# Altium PCB ZUCC_EG_Robot2018_Ver1.0.PcbDoc
Units mm, origin at the board's own origin, x right, y up, seen from the top; angles counter-clockwise.
Board outline 99.95 x 99.95 mm, 2 copper layers (Top Layer, Bottom Layer); 25 components, 35 nets, 203 pads, 25 vias.
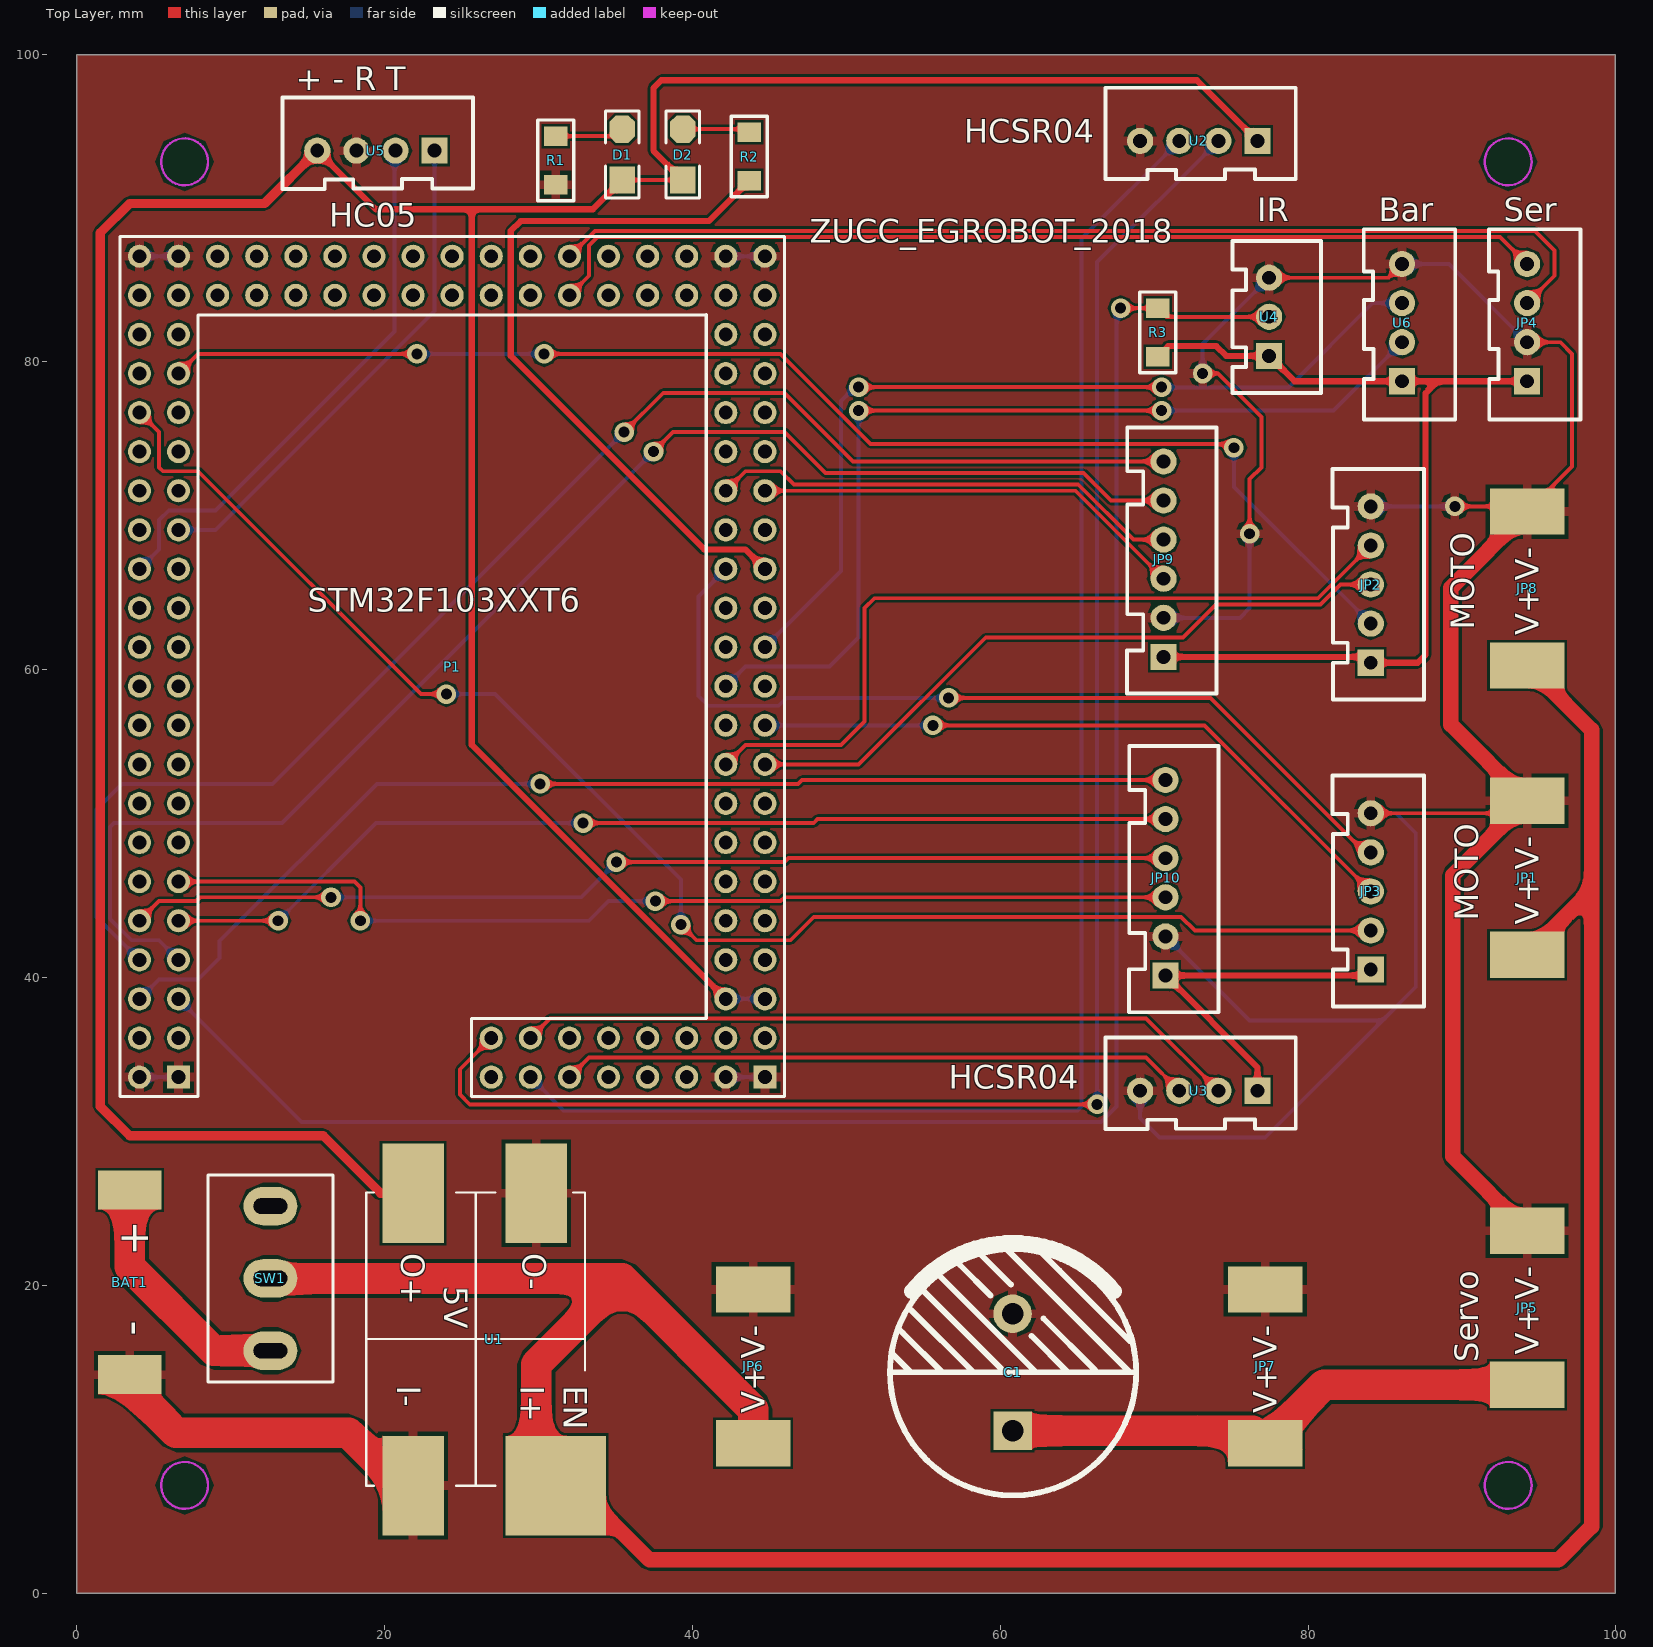
[diagram p0: Top Layer view]
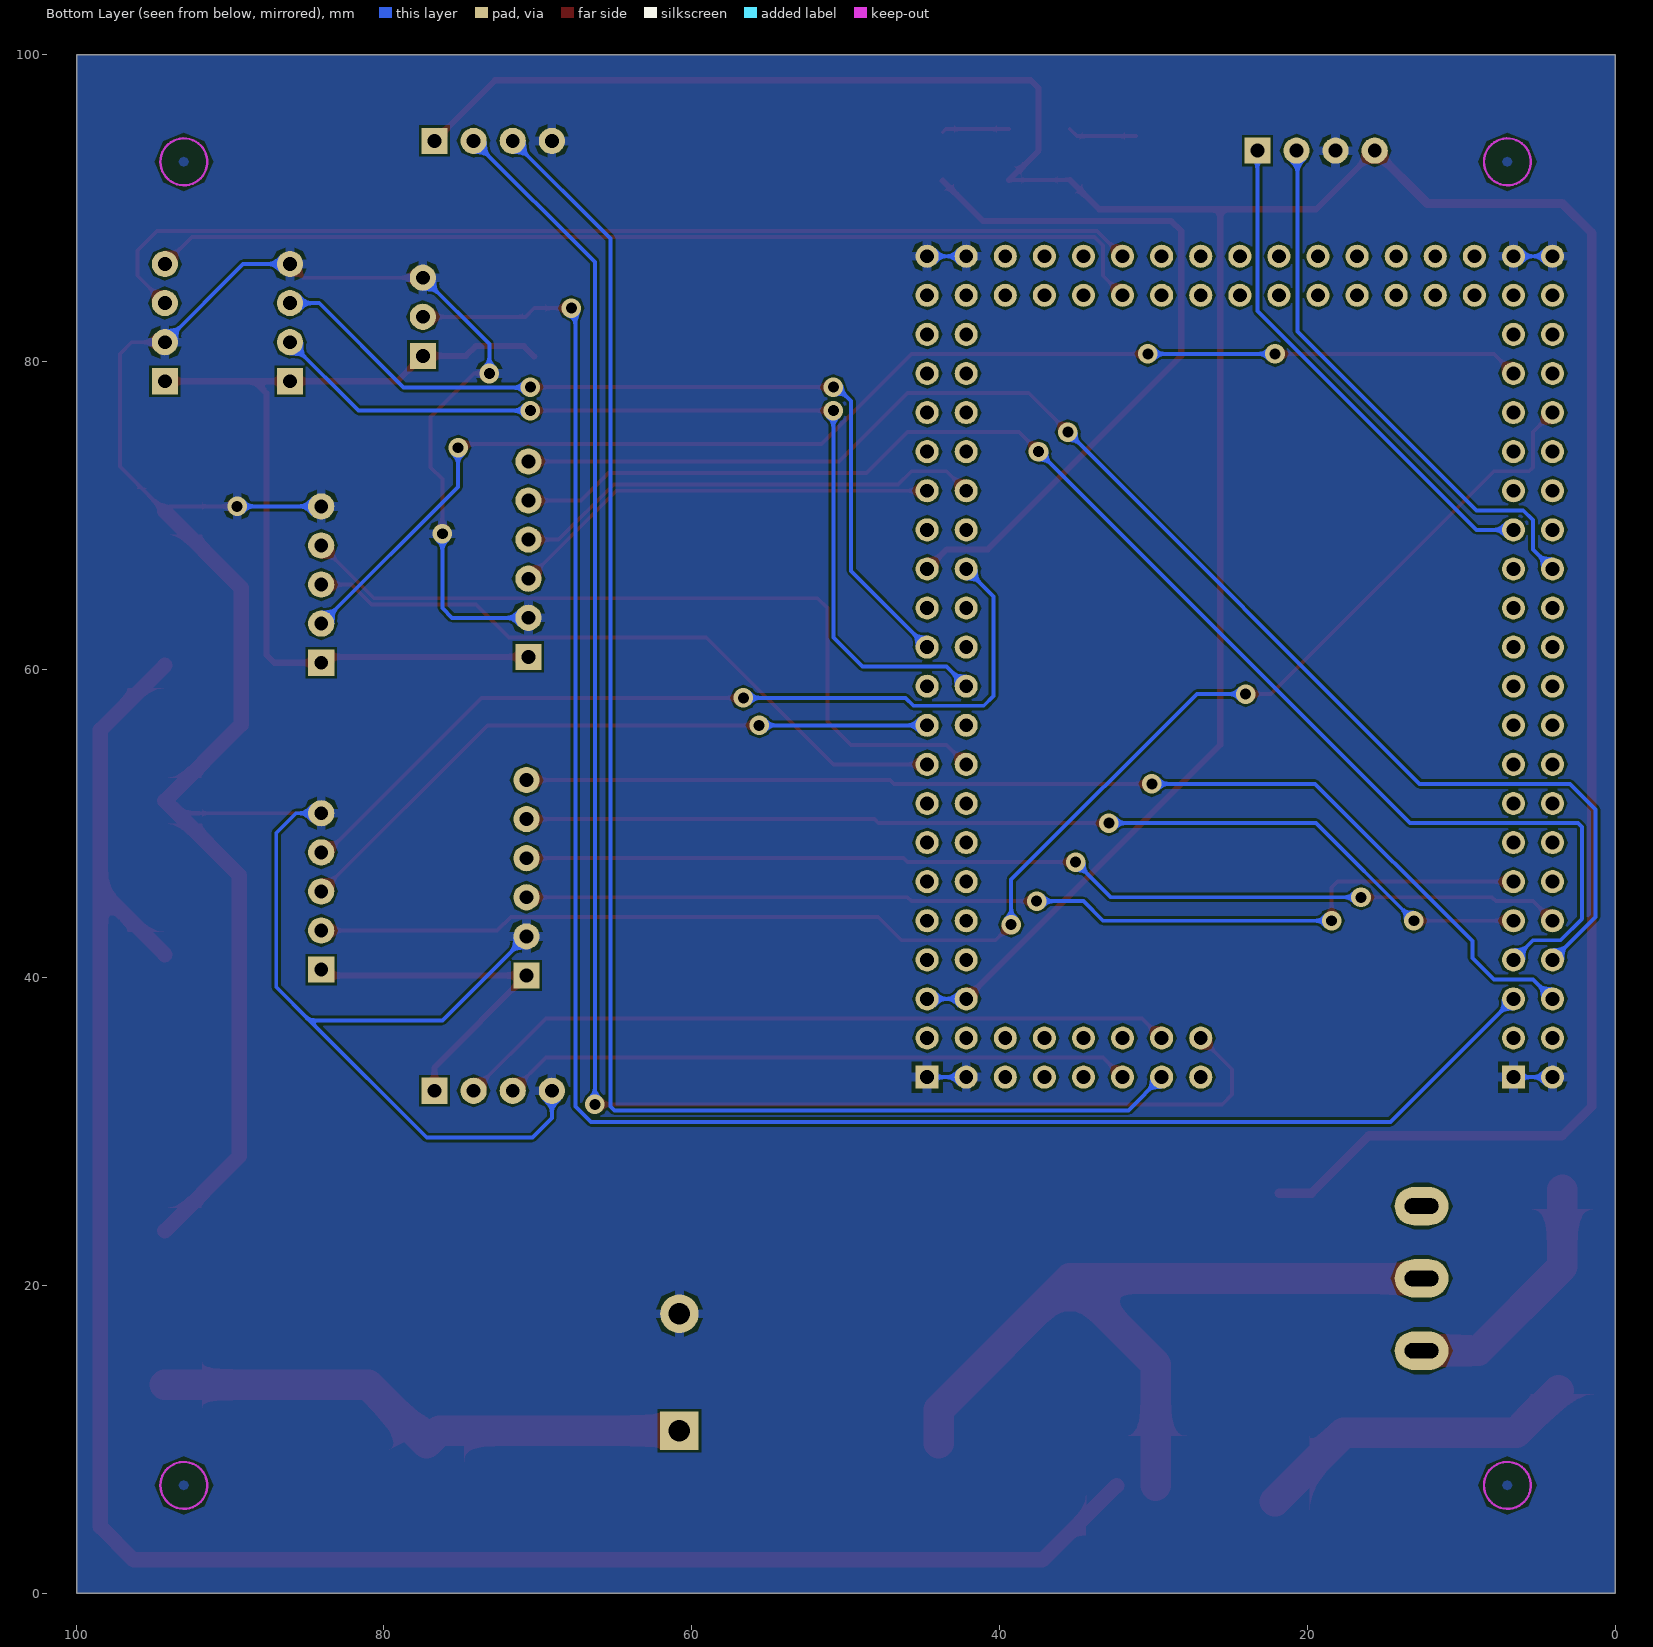
[diagram p1: Bottom Layer view, seen from below]
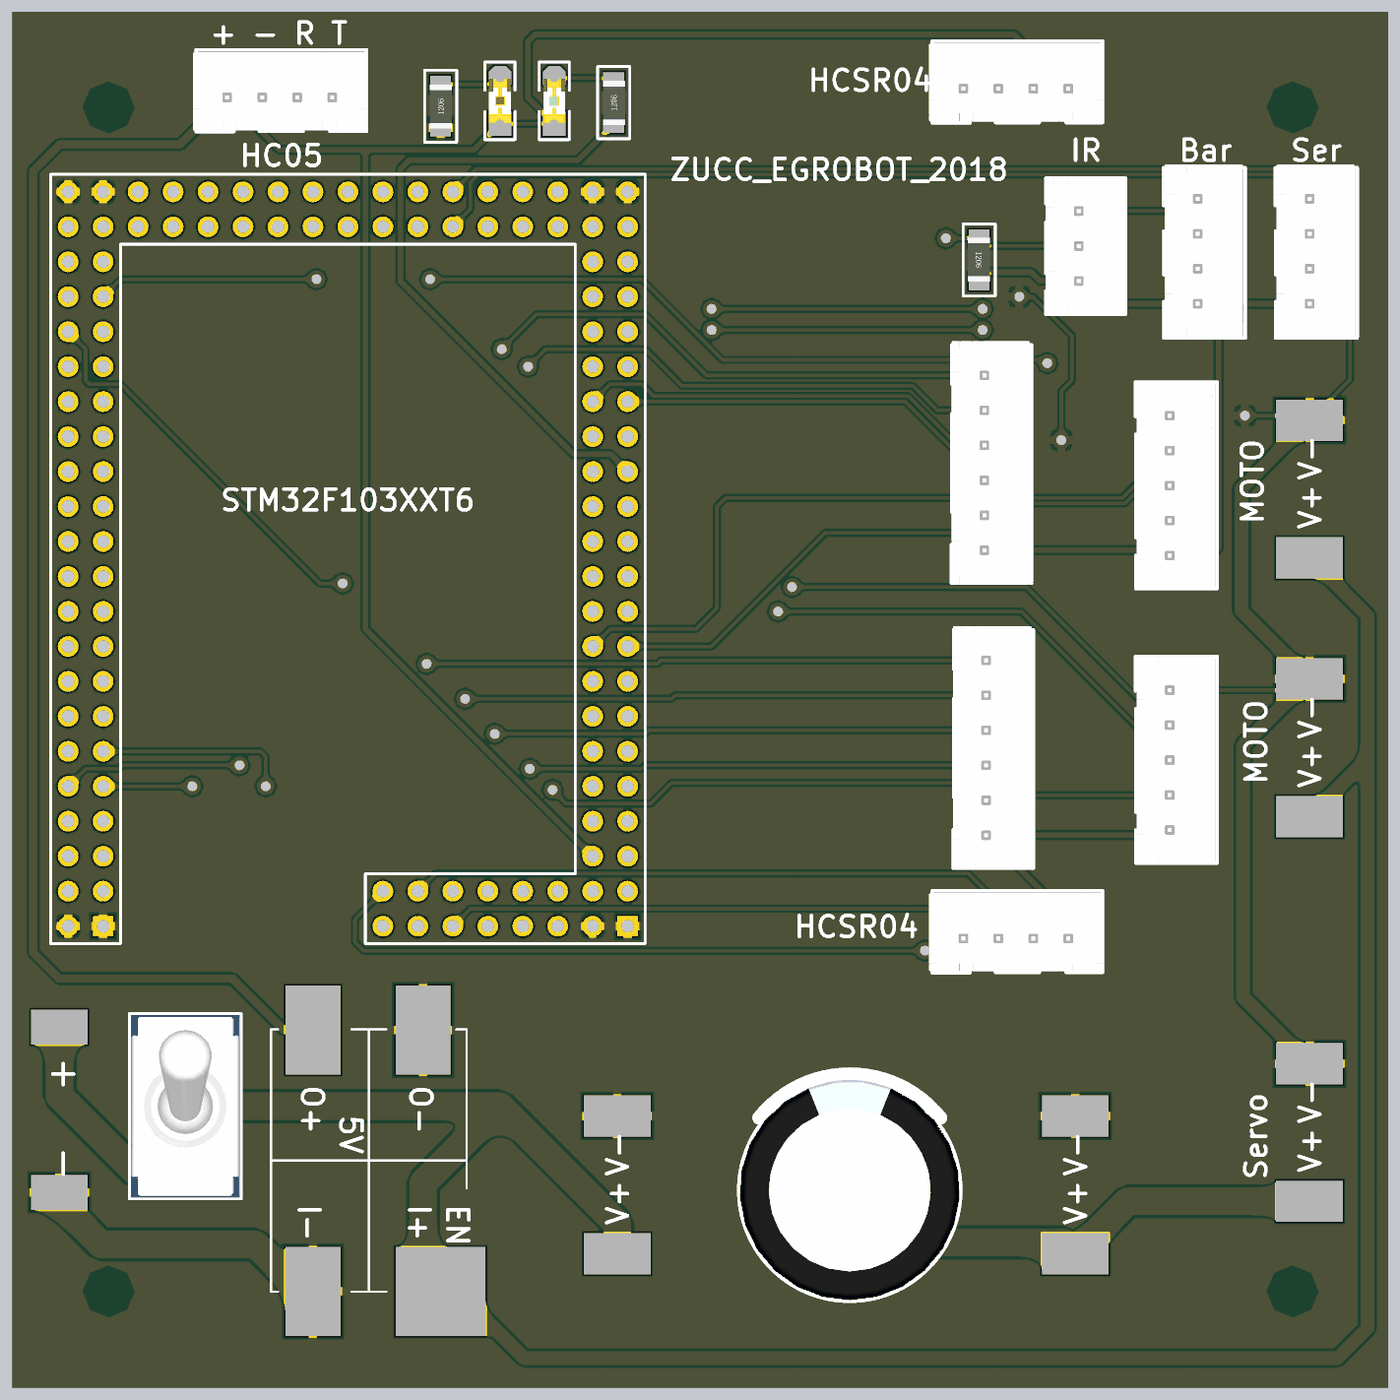
[diagram p2: 3D render of the assembled board from above, using the file's embedded part models]

## Layer stack, top to bottom
Top Solder: solder mask 0.0102, Solder Resist, Dk 3.5
Top Layer: signal copper 0.0356
Dielectric 1: dielectric 0.32, FR-4, Dk 4.8
Bottom Layer: signal copper 0.0356
Bottom Solder: solder mask 0.0102, Solder Resist, Dk 3.5

## Board outline
0,0 99.949,0 99.949,99.949 0,99.949

## Design rules (kind name [scope] priority, off if disabled: settings)
Clearance [All] p1: gap=0.152 ignorepadtopadclearanceinfootprint=FALSE
ComponentClearance ComponentClearance_P1 [HasFootprint('YD最小系统版接口')] p1: gap=0 collisioncheckmode=3 verticalgap=0
ComponentClearance [All] p2: gap=0.254 collisioncheckmode=3 verticalgap=0.254 showdistances=FALSE
Height [All] p1: minheight=0 maxheight=100 prefheight=12.7
HoleSize [All] p1: absolutevalues=TRUE maxlimit=6 minlimit=0.3 maxpercent=80.000 minpercent=20.000
HoleToHoleClearance [All] p1: gap=0.152 allowstackedmicrovias=TRUE
PolygonConnect [All] p1: connectstyle=Relief reliefconductorwidth=0.6 reliefentries=4 polygonreliefangle="90 Angle" airgapwidth=0.254
RoutingVias [All] p1: holewidth=0.3 width=0.6 viastyle="Through Hole" minholewidth=0.2 minwidth=0.45 maxholewidth=6.3 maxwidth=5
SilkToSilkClearance [All] p1: silktosilkclearance=0.152
SilkToSolderMaskClearance [IsPad] p1: minsilkscreentomaskgap=0.152 clearancetoexposedcopper=TRUE
SolderMaskExpansion [All] p1: expansion=0.102
Width [All] p1: maxlimit=6 minlimit=0.152 preferedwidth=0.254
24 further rules are at their usual default settings.

## Components (designator, comment, footprint, x,y, rotation, side; value= is the part's Value field where it differs from the comment)
BAT1 "BAT7.4" POWER 3.429,20.193 r270 top
C1 "4.7mF" "CAP 7.5*16*31.5 - BK" 60.833,14.351 r90 top
D1 "1206LED" "LED 1206R" 35.433,93.472 r90 top
D2 "LED" "LED 1206Y" 39.37,93.472 r90 top
JP1 "电机电源接口" SMALL_POWER_JACK 94.234,46.482 r90 top
JP2 "Jack" XH2.54-LI-5P 84.074,65.532 r90 top
JP3 "Jack" XH2.54-LI-5P 84.074,45.593 r90 top
JP4 "舵机控制串口" XH2.54-LI-4P 94.234,82.55 r90 top
JP5 "DCservo" SMALL_POWER_JACK 94.234,18.542 r90 top
JP6 "DC_ServoIN" SMALL_POWER_JACK 43.942,14.732 r90 top
JP7 "DC_ServoOUT" SMALL_POWER_JACK 77.216,14.732 r90 top
JP8 "电机电源接口" SMALL_POWER_JACK 94.234,65.278 r90 top
JP9 "Jack" XH2.54-LI-6P 70.612,67.183 r90 top
JP10 "Jack" XH2.54-LI-6P 70.739,46.482 r90 top
P1 "Header 63X2" YD最小系统版接口 24.384,60.198 r90 top
R1 "R" 1206R 31.115,93.091 r90 top
R2 "R" 1206R 43.688,93.345 r90 top
R3 "R" 1206R 70.231,81.915 r270 top
SW1 "MTS-10" MTS-10x 12.573,20.448 r90 top
U1 "DC5V" DC5V_BUCKBOOST 25.908,16.51 r270 top
U2 "距离传感器" XH2.54-LI-4P 72.898,94.361 r180 top
U3 "距离传感器" XH2.54-LI-4P 72.898,32.639 r180 top
U4 "漫反射红外避障" XH2.54-LI-3P 77.47,82.931 r90 top
U5 "HC05" XH2.54-LI-4P 19.431,93.726 r180 top
U6 "扫码枪串口" XH2.54-LI-4P 86.106,82.55 r90 top

## Footprints (in the part's own frame and the unit in brackets; to place one, negate y for a bottom-side part, rotate by r counter-clockwise, add the part's x,y. Pads: shape width x height; smd on the part's side, far side on the other; paste and mask are expansions set on the pad)
1206R [mil]
  rect 50x60 smd: 1(-62,0) 2(62,0)
  silkscreen extent -103,-46 103,46, body extent -64,-32 62,31, height 24
"CAP 7.5*16*31.5 - BK" [mm] "脚距7.5mm直径16mm高度31.5mm"
  rect 2.5x2.5 hole 1.4: 1(-3.8,0.038)
  round 2.5 hole 1.4: 2(3.8,0.038)
  silkscreen extent -8,-8 8.42,8, body extent -8,-8 8.01,8, height 31.54
DC5V_BUCKBOOST [mm] "自动升降压稳压模块"
  rect 6.47x4 smd: 1(-9.475,3.936) 2(-9.475,-4.064) 3(9.525,6.476) 4(9.525,3.936) 5(9.525,-4.064)
  silkscreen extent -9.53,-7.11 9.53,7.11
"LED 1206R" [mil] "红色1206LED"
  rect 70x65 smd: 1(-65,0)
  oct 70x65 smd: 2(65,0)
  silkscreen extent -111,-43 111,43, body extent -63,-32 63,32, height 36
"LED 1206Y" [mil] "黄色1206LED"
  rect 70x65 smd: 1(-65,0)
  oct 70x65 smd: 2(65,0)
  silkscreen extent -111,-43 111,43, body extent -63,-32 63,32, height 36
MTS-10x [mm] "MTS10系列3脚扭子开关"
  oval 2.5x3.5 hole 1 slot 2.2 at 90 deg: 1(-4.7,0) 2(0,0)
  oval 2.5x3.5 hole 1 slot 2.2 at 90 deg unplated: 3(4.7,0)
  silkscreen extent -6.73,-4.06 6.73,4.06, body extent -6.6,-3.95 6.6,3.95, height 30.47
POWER [mm] "POWER COM"
  rect 2.54x4.11 smd: 1(-6,0) 2(6,0)
SMALL_POWER_JACK [mm]
  rect 3x4.854 smd: 1(-5,0) 2(5,0)
XH2.54-LI-3P [mm] "接插件，3P"
  rect 1.7x1.7 hole 0.9: 1(-2.54,0)
  round 1.7 hole 0.9: 2(0,0) 3(2.54,0)
  silkscreen extent -4.95,-3.38 4.93,2.39, body extent -5.04,-3.3 5.04,2.4, height 7.03
XH2.54-LI-4P [mm] "接插件，4P"
  rect 1.7x1.7 hole 0.9: 1(-3.81,0)
  round 1.7 hole 0.9: 2(-1.27,0) 3(1.27,0) 4(3.81,0)
  silkscreen extent -6.3,-3.45 6.07,2.49, body extent -6.31,-3.3 6.31,2.4, height 7.03
XH2.54-LI-5P [mm] "接插件，5P"
  rect 1.7x1.7 hole 0.9: 1(-5.08,0)
  round 1.7 hole 0.9: 2(-2.54,0) 3(0,0) 4(2.54,0) 5(5.08,0)
  silkscreen extent -7.48,-3.45 7.52,2.49, body extent -7.58,-3.3 7.58,2.4, height 7.03
XH2.54-LI-6P [mm] "接插件，6P"
  rect 1.7x1.7 hole 0.9: 1(-6.35,0)
  round 1.7 hole 0.9: 2(-3.81,0) 3(-1.27,0) 4(1.27,0) 5(3.81,0) 6(6.35,0)
  silkscreen extent -8.74,-3.43 8.56,2.39, body extent -8.85,-3.3 8.85,2.4, height 7.03
YD最小系统版接口 [mm]
  rect 1.5x1.5 hole 0.9: 1(-26.67,17.78) 113(-26.67,-20.32)
  round 1.5 hole 0.9: 2(-26.67,20.32) 3(-24.13,17.78) 4(-24.13,20.32) 5(-21.59,17.78) 6(-21.59,20.32) 7(-19.05,17.78) 8(-19.05,20.32) 9(-16.51,17.78) 10(-16.51,20.32) 11(-13.97,17.78) 12(-13.97,20.32) 13(-11.43,17.78) 14(-11.43,20.32) 15(-8.89,17.78) 16(-8.89,20.32) 17(-6.35,17.78) 18(-6.35,20.32) 19(-3.81,17.78) 20(-3.81,20.32) 21(-1.27,17.78) 22(-1.27,20.32) 23(1.27,17.78) 24(1.27,20.32) 25(3.81,17.78) 26(3.81,20.32) 27(6.35,17.78) 28(6.35,20.32) 29(8.89,17.78) 30(8.89,20.32) 31(11.43,17.78) 32(11.43,20.32) 33(13.97,17.78) 34(13.97,20.32) 35(16.51,17.78) 36(16.51,20.32) 37(19.05,17.78) 38(19.05,20.32) 39(21.59,17.78) 40(21.59,20.32) 41(24.13,17.78) 42(24.13,20.32) 43(26.67,17.78) 44(26.67,20.32) 45(24.13,15.24) 46(26.67,15.24) 47(24.13,12.7) 48(26.67,12.7) 49(24.13,10.16) 50(26.67,10.16) 51(24.13,7.62) 52(26.67,7.62) 53(24.13,5.08) 54(26.67,5.08) 55(24.13,2.54) 56(26.67,2.54) 57(24.13,0) 58(26.67,0) 59(24.13,-2.54) 60(26.67,-2.54) 61(24.13,-5.08) 62(26.67,-5.08) 63(24.13,-7.62) 64(26.67,-7.62) 65(24.13,-10.16) 66(26.67,-10.16) 67(24.13,-12.7) 68(26.67,-12.7) 69(24.13,-15.24) 70(26.67,-15.24) 71(24.13,-17.78) 72(26.67,-17.78) 73(24.13,-20.32) 74(26.67,-20.32) 75(21.59,-20.32) 76(21.59,-17.78) 77(19.05,-20.32) 78(19.05,-17.78) 79(16.51,-20.32) 80(16.51,-17.78) 81(13.97,-20.32) 82(13.97,-17.78) 83(11.43,-20.32) 84(11.43,-17.78) 85(8.89,-20.32) 86(8.89,-17.78) 87(6.35,-20.32) 88(6.35,-17.78) 89(3.81,-20.32) 90(3.81,-17.78) 91(1.27,-20.32) 92(1.27,-17.78) 93(-1.27,-20.32) 94(-1.27,-17.78) 95(-3.81,-20.32) 96(-3.81,-17.78) 97(-6.35,-20.32) 98(-6.35,-17.78) 99(-8.89,-20.32) 100(-8.89,-17.78) 101(-11.43,-20.32) 102(-11.43,-17.78) 103(-13.97,-20.32) 104(-13.97,-17.78) 105(-16.51,-20.32) 106(-16.51,-17.78) 107(-19.05,-20.32) 108(-19.05,-17.78) 109(-21.59,-20.32) 110(-21.59,-17.78) 111(-24.13,-20.32) 112(-24.13,-17.78) 114(-26.67,-17.78) 115(-26.67,-15.24) 116(-24.13,-15.24) 117(-26.67,-12.7) 118(-24.13,-12.7) 119(-26.67,-10.16) 120(-24.13,-10.16) 121(-26.67,-7.62) 122(-24.13,-7.62) 123(-26.67,-5.08) 124(-24.13,-5.08) 125(-26.67,-2.54) 126(-24.13,-2.54)
  silkscreen extent -27.94,-21.59 27.94,21.59

## Part data
BAT1: library part POWER_COM
C1: library part CAP_DIP7.6*16.35, "7.6*16*35"
D1: library part LED_RED, "LED"
D2: library part LED_GY
JP1 JP8: library part DC_moto
JP2 JP3: library part Moto, "White Small"
JP5: "Power input for Servo Control Board"
JP9 JP10: library part 循迹模块, "White Small"
P1: "Header, 126-Pin, Dual row", LatestRevisionDate=17-Jul-2002, LatestRevisionNote="Re-released for DXP Platform.", Publisher="Altium Limited"
R1 R2 R3: library part SMT1206, "SMT_1206"
SW1: library part MTS_10-DIP, "MTS-10 series"
U1: "DC5V Fixed Buck-Boost voltage regulator"
U2 U3: library part HCSR04, "Ultrasonic distant detector"
U4: library part 红外避障
U6: library part 扫码枪

## Via types
v1: diameter 1.27, hole 0.711, Top Layer to Bottom Layer, tented both sides, 25 vias

## Nets (pads, with @x,y where several pads share a name; then routed paths per layer and width w, separated by ;. In a path a pad name is that pad's centre, name@x,y a point inside that pad or via, vN(x,y) a via of type N, cw(c..) or ccw(c..) an arc to the next point about the centre after c; other vN are vias at no path point)
+5: D1.1 D2.1 P1.109 P1.110 U1.2 U2.1 U5.4 | length 230.4
  Top Layer w0.254: D1.1 D2.1
  Top Layer w0.4: U5.4 19.431,89.916 25.654,89.916 ; D1.1 33.528,89.916 25.654,89.916 ; D2.1 37.465,93.726 37.465,97.79 37.973,98.298 72.771,98.298 U2.1 ; P1.110 25.654,55.118 25.654,89.916
  Top Layer w0.6: U5.4 12.192,90.297 3.429,90.297 1.524,88.392 1.524,31.623 3.429,29.718 16.002,29.718 19.735,25.985 U1.2
  Bottom Layer w0.254: P1.110 P1.109
+5_LEFT: JP2.1 JP4.1 JP9.1 R3.2 U4.1 U6.1 | length 60.7
  Top Layer w0.4: R3.2 70.917,81.026 74.041,81.026 74.676,80.391 U4.1 79.121,78.74 U6.1 88.392,78.74 ; JP9.1 83.693,60.833 JP2.1 87.122,60.452 87.63,60.96 87.63,77.978 88.392,78.74 ; JP4.1 88.392,78.74
+5_RIGHT: JP3.1 JP10.1 U3.1 | length 23.5
  Top Layer w0.4: U3.1 76.708,34.163 JP10.1 83.693,40.132 JP3.1
BAT_IN: JP1.1 JP6.1 JP8.1 SW1.2 U1.3 U1.4 | length 185.4
  Top Layer w1: U1.3 37.21,2.159 96.266,2.159 98.425,4.318 98.425,45.673 ; JP1.1 98.425,45.673 ; JP8.1 98.425,56.087 98.425,45.673
  Top Layer w2: SW1.2 35.434,20.448 ; U1.4 29.844,14.858 35.434,20.448 ; JP6.1 43.942,11.94 35.434,20.448
GND: BAT1.2 C1.2 JP1.2 JP2.5 JP3.5 JP4.2 JP5.2 JP6.2 JP7.2 JP8.2 JP9.2 JP10.2 P1.1 P1.2 P1.43 P1.44 P1.72 P1.74 P1.113 P1.114 R1.1 U1.1 U1.5 U2.4 U3.4 U4.3 U5.3 U6.4 | length 225.6
  Top Layer w0.254: v1(73.152,79.248) 74.143,79.248 76.962,76.429 76.962,73.152 76.2,72.39 v1(76.2,68.834) ; U4.3 85.217,85.471 U6.4 ; JP3.5 JP1.2@93.425,50.673 ; v1(89.535,70.612) 93.9,70.612 JP8.2 97.155,73.199 97.155,80.518 96.393,81.28 JP4.2
  Top Layer w1: JP5.2 89.408,28.368 89.408,46.656 93.425,50.673 JP1.2 89.281,56.435 89.281,65.325 JP8.2
  Top Layer w2: BAT1.2@3.683,13.177 6.446,10.414 17.653,10.414 U1.5@22.098,5.969
  Bottom Layer w0.254: P1.2 P1.1 ; P1.44 P1.43 ; P1.114 P1.113 ; P1.72 P1.74 ; U3.4 69.088,30.861 70.358,29.591 77.216,29.591 84.836,37.211 ; JP9.2 75.565,63.373 76.2,64.008 v1(76.2,68.834) ; JP10.2 76.2,37.211 84.836,37.211 ; v1(73.152,79.248) 73.152,81.153 U4.3 ; JP3.5 85.725,50.673 86.995,49.403 86.995,39.37 84.836,37.211 ; JP2.5 v1(89.535,70.612) ; U6.4 89.154,86.36 JP4.2
IR_OUT: P1.5 R3.1 U4.2 | length 126.6
  Top Layer w0.254: v1(67.818,83.49) R3.1 70.79,82.931 U4.2
  Bottom Layer w0.254: P1.5 14.605,30.607 66.548,30.607 67.564,31.623 67.564,83.236 v1(67.818,83.49)
LED_FLASH: P1.87 R2.1 | length 47.2
  Top Layer w0.4: R2.1 41.072,89.154 28.829,89.154 28.194,88.519 28.194,80.391 40.767,67.818 43.434,67.818 P1.87
LEFT_IN1: JP2.3 P1.97 | length 44.2
  Top Layer w0.254: P1.97 50.8,53.848 59.055,62.103 71.882,62.103 74.016,64.237 80.813,64.237 82.108,65.532 JP2.3
LEFT_IN2: JP2.4 P1.98 | length 52.1
  Top Layer w0.254: P1.98 43.434,55.118 49.657,55.118 51.181,56.642 51.181,64.008 51.816,64.643 80.645,64.643 JP2.4
LEFT_PWM: JP2.2 P1.37 | length 86.7
  Top Layer w0.254: P1.37 7.874,80.518 v1(22.098,80.518) ; v1(30.353,80.518) 45.72,80.518 51.576,74.662 74.944,74.662 v1(75.184,74.422)
  Bottom Layer w0.254: v1(22.098,80.518) v1(30.353,80.518) ; v1(75.184,74.422) 75.184,71.882 JP2.2
NetBAT1_1: BAT1.1 SW1.1 | length 16.4
  Top Layer w2: BAT1.1 3.429,21.209 8.89,15.748 SW1.1
NetD1_2: D1.2 R1.2 | length 4.5
  Top Layer w0.254: R1.2 34.976,94.666 D1.2
NetD2_2: D2.2 R2.2 | length 4.4
  Top Layer w0.254: D2.2 43.485,95.123 R2.2
RIGHT_IN1: JP3.3 P1.95 | length 43.8
  Top Layer w0.254: v1(55.626,56.388) 73.279,56.388 JP3.3
  Bottom Layer w0.254: P1.95 v1(55.626,56.388)
RIGHT_IN2: JP3.4 P1.88 | length 57.3
  Top Layer w0.254: v1(56.642,58.166) 73.66,58.166 83.693,48.133 JP3.4
  Bottom Layer w0.254: P1.88 40.386,64.77 40.386,58.293 41.021,57.658 45.593,57.658 46.101,58.166 v1(56.642,58.166)
RIGHT_PWM: JP3.2 P1.36 | length 98.3
  Top Layer w0.254: P1.36 5.334,75.438 5.334,73.152 5.588,72.898 7.874,72.898 22.352,58.42 v1(24.003,58.42) ; v1(39.243,43.434) 40.259,42.418 46.355,42.418 47.879,43.942 71.755,43.942 72.644,43.053 JP3.2
  Bottom Layer w0.254: v1(24.003,58.42) 27.178,58.42 39.243,46.355 v1(39.243,43.434)
Trail1_IN1: JP9.3 P1.83 | length 28.3
  Top Layer w0.254: P1.83 64.897,71.628 JP9.3
Trail1_IN2: JP9.4 P1.84 | length 30.8
  Top Layer w0.254: P1.84 43.434,72.898 45.72,72.898 46.584,72.034 65.065,72.034 68.646,68.453 JP9.4
Trail1_IN3: JP9.5 P1.7 | length 92.4
  Top Layer w0.254: v1(37.465,74.168) 38.735,75.438 45.974,75.438 48.641,72.771 65.405,72.771 67.183,70.993 JP9.5
  Bottom Layer w0.254: P1.7 5.334,42.418 3.556,42.418 2.159,43.815 2.159,49.784 2.413,50.038 13.335,50.038 v1(37.465,74.168)
Trail1_IN4: JP9.6 P1.8 | length 93.3
  Top Layer w0.254: v1(35.56,75.438) 38.1,77.978 45.974,77.978 50.419,73.533 JP9.6
  Bottom Layer w0.254: P1.8 1.27,43.942 1.27,50.927 2.921,52.578 12.7,52.578 v1(35.56,75.438)
Trail2_IN1: JP10.3 P1.11 | length 67.1
  Top Layer w0.254: P1.11 18.034,46.228 18.415,45.847 v1(18.415,43.688) ; v1(37.592,44.958) 45.72,44.958 45.974,45.212 JP10.3
  Bottom Layer w0.254: v1(18.415,43.688) 33.274,43.688 34.544,44.958 v1(37.592,44.958)
Trail2_IN2: JP10.4 P1.10 | length 68.4
  Top Layer w0.254: P1.10 5.334,44.958 7.747,44.958 8.001,45.212 v1(16.51,45.212) ; v1(35.052,47.498) 45.974,47.498 46.228,47.752 JP10.4
  Bottom Layer w0.254: v1(16.51,45.212) 32.766,45.212 v1(35.052,47.498)
Trail2_IN3: JP10.5 P1.9 | length 66.9
  Top Layer w0.254: P1.9 v1(13.081,43.688) ; v1(32.893,50.038) 47.879,50.038 48.133,50.292 JP10.5
  Bottom Layer w0.254: v1(13.081,43.688) 19.431,50.038 v1(32.893,50.038)
Trail2_IN4: JP10.6 P1.6 | length 73.2
  Top Layer w0.254: v1(30.099,52.578) 46.863,52.578 47.117,52.832 JP10.6
  Bottom Layer w0.254: P1.6 5.334,39.878 7.874,39.878 9.271,41.275 9.271,42.36 19.489,52.578 v1(30.099,52.578)
US1_ECHO: P1.123 U2.3 | length 102.2
  Bottom Layer w0.254: P1.123 31.623,31.369 65.024,31.369 65.278,31.623 65.278,88.011 U2.3
US1_TRIG: P1.126 U2.2 | length 112.1
  Top Layer w0.254: P1.126 24.892,34.036 24.892,32.385 25.527,31.75 v1(66.294,31.75)
  Bottom Layer w0.254: v1(66.294,31.75) 66.294,86.487 U2.2
US2_ECHO: P1.121 U3.3 | length 41
  Top Layer w0.254: P1.121 33.274,34.798 69.469,34.798 U3.3
US2_TRIG: P1.124 U3.2 | length 47.2
  Top Layer w0.254: P1.124 30.734,37.338 69.469,37.338 U3.2
USART2_RX: P1.91 U6.3 | length 57.2
  Top Layer w0.254: v1(50.8,78.359) v1(70.485,78.359)
  Bottom Layer w0.254: P1.91 49.657,66.421 49.657,77.47 50.546,78.359 v1(50.8,78.359) ; v1(70.485,78.359) 70.51,78.334 78.715,78.334 84.201,83.82 U6.3
USART2_TX: P1.94 U6.2 | length 61.8
  Top Layer w0.254: v1(50.8,76.835) v1(70.485,76.835)
  Bottom Layer w0.254: P1.94 43.434,60.198 48.895,60.198 50.8,62.103 v1(50.8,76.835) ; v1(70.485,76.835) 81.661,76.835 U6.2
USART3_RX: JP4.4 P1.63 | length 65.7
  Top Layer w0.254: P1.63 33.274,85.598 33.274,87.564 33.823,88.113 92.481,88.113 JP4.4
USART3_TX: JP4.3 P1.64 | length 69.4
  Top Layer w0.254: P1.64 33.655,88.519 94.742,88.519 96.012,87.249 96.012,85.598 JP4.3
USART4_RX: P1.28 U5.2 | length 35.9
  Bottom Layer w0.254: P1.28 5.334,67.818 5.334,69.723 5.969,70.358 9.017,70.358 20.637,81.978 20.637,93.662 U5.2
USART4_TX: P1.29 U5.1 | length 32.9
  Bottom Layer w0.254: P1.29 9.017,69.088 23.241,83.312 U5.1
V_Servo: C1.1 JP5.1 JP7.1 | length 35.4
  Top Layer w2: C1.1 76.397,10.551 JP7.1 81.026,13.542 JP5.1
pads on no net: P1.3 P1.4 P1.12 P1.13 P1.14 P1.15 P1.16 P1.17 P1.18 P1.19 P1.20 P1.21 P1.22 P1.23 P1.24 P1.25 P1.26 P1.27 P1.30 P1.31 P1.32 P1.33 P1.34 P1.35 P1.38 P1.39 P1.40 P1.41 P1.42 P1.45 P1.46 P1.47 P1.48 P1.49 P1.50 P1.51 P1.52 P1.53 P1.54 P1.55 P1.56 P1.57 P1.58 P1.59 P1.60 P1.61 P1.62 P1.65 P1.66 P1.67 P1.68 P1.69 P1.70 P1.71 P1.73 P1.75 P1.76 P1.77 P1.78 P1.79 P1.80 P1.81 P1.82 P1.85 P1.86 P1.89 P1.90 P1.92 P1.93 P1.96 P1.99 P1.100 P1.101 P1.102 P1.103 P1.104 P1.105 P1.106 P1.107 P1.108 P1.111 P1.112 P1.115 P1.116 P1.117 P1.118 P1.119 P1.120 P1.122 P1.125 SW1.3

## Polygon pours and split planes (outlines as drawn)
GND on Bottom Layer "GND_L02_P000" (solid, pour order 0): 0,0 99.949,0 99.949,99.949 0,99.949
GND on Top Layer "GND_L01_P001" (solid, pour order 1): 0,0 99.949,0 99.949,99.949 0,99.949

## Keep-outs
Keep-Out Layer:
  circle w0.152: c93,7 r1.524
  circle w0.152: c93,93 r1.524
  circle w0.152: c7,93 r1.524
  circle w0.152: c7,7 r1.524

## Silkscreen, mask and mechanical layers (free items; w line width, h text height)
Top Overlay:
  pour cut-out: 93.091,94.869
  text "+ - R T" at 14.224,97.663 h1.52
  text "HCSR04" at 57.658,94.234 h1.52
  text "IR" at 76.708,89.154 h1.52
  text "Bar" at 84.582,89.154 h1.52
  text "Ser" at 92.71,89.154 h1.52
  text "HC05" at 16.383,88.773 h1.52
  text "ZUCC_EGROBOT_2018" at 47.625,87.757 h1.52
  text "STM32F103XXT6" at 14.986,63.754 h1.52
  text "MOTO" at 90.805,62.611 h1.52 r90
  text "MOTO" at 91.059,43.688 h1.52 r90
  text "HCSR04" at 56.642,32.766 h1.52
  text "Servo" at 91.059,14.986 h1.52 r90

## Text inside footprints (layer, text, board x,y; h text height)
BAT1: Top Overlay "-" at 2.929,17.693 h2 r270; Top Overlay "+" at 2.929,24.193 h2 r270
JP1: Top Overlay "V+" at 94.996,43.434 h1.52 r90; Top Overlay "V-" at 94.996,46.99 h1.52 r90
JP5: Top Overlay "V+" at 94.996,15.494 h1.52 r90; Top Overlay "V-" at 94.996,19.05 h1.52 r90
JP6: Top Overlay "V-" at 44.704,15.24 h1.52 r90; Top Overlay "V+" at 44.704,11.684 h1.52 r90
JP7: Top Overlay "V-" at 77.978,15.24 h1.52 r90; Top Overlay "V+" at 77.978,11.684 h1.52 r90
JP8: Top Overlay "V+" at 94.996,62.23 h1.52 r90; Top Overlay "V-" at 94.996,65.786 h1.52 r90
U1: Top Overlay "5V" at 23.876,19.939 h1.52 r270; Top Overlay "I+" at 28.829,13.462 h1.52 r270; Top Overlay "O-" at 28.956,22.098 h1.52 r270; Top Overlay "O+" at 21.082,22.098 h1.52 r270; Top Overlay "EN" at 31.623,13.462 h1.52 r270; Top Overlay "I-" at 20.828,13.462 h1.52 r270